# Altium PCB MOTHERBOARD.PcbDoc (part 2 of 3)
Units mm, origin at the board's own origin, x right, y up, seen from the top; angles counter-clockwise.
Board outline 187 x 77 mm, 4 copper layers (Top Layer, Layer 1, Layer 2, Bottom Layer), stack 1.57 mm thick; 242 components, 225 nets, 1094 pads, 711 vias.
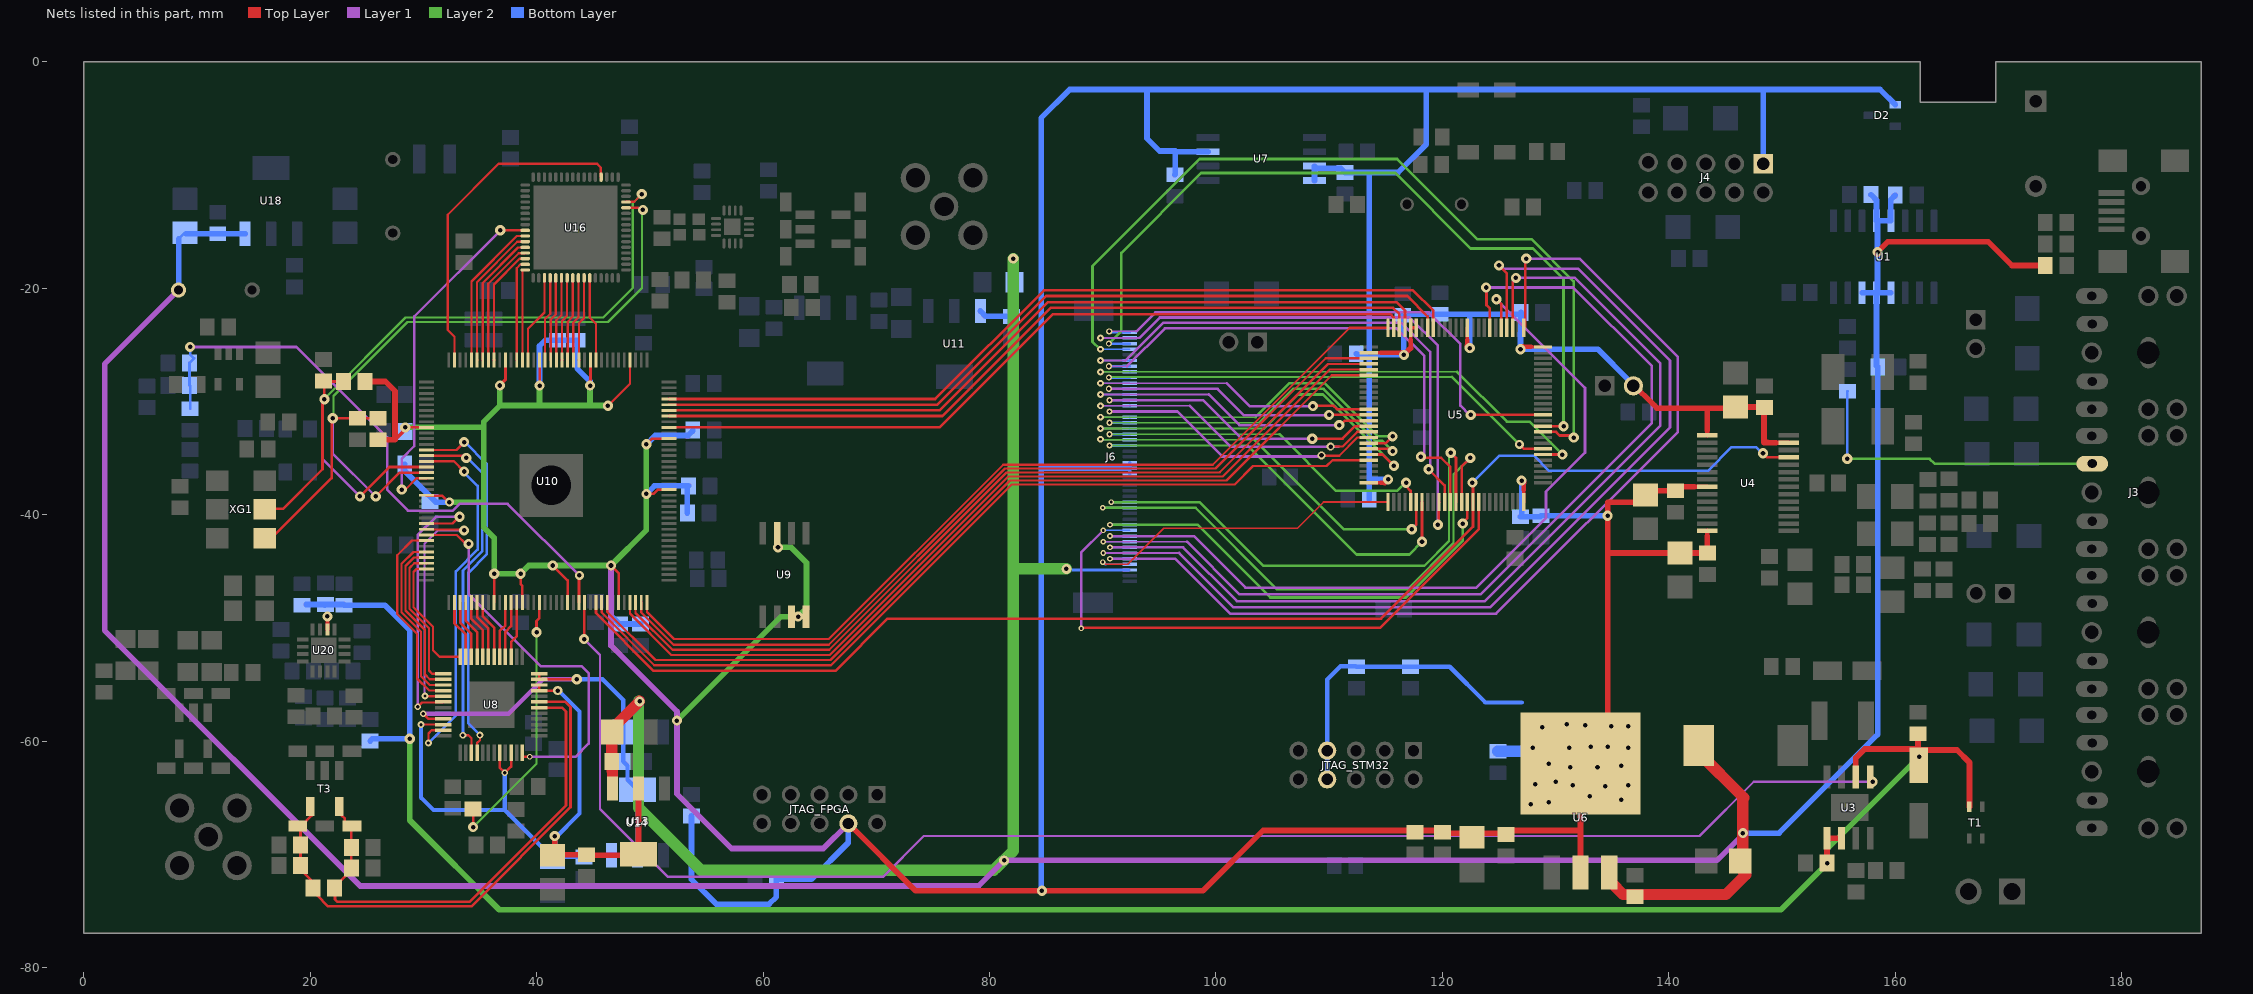
[diagram p4: the nets of this part, all layers, seen from the top]

## Via types
v1: diameter 0.9, hole 0.4, Top Layer to Bottom Layer, tented both sides, 305 vias
v2: diameter 0.6, hole 0.3, Top Layer to Bottom Layer, tented both sides, 286 vias
v3: diameter 0.5, hole 0.3, Top Layer to Bottom Layer, tented both sides, 69 vias
v4: diameter 0.5, hole 0.25, Top Layer to Bottom Layer, tented both sides, 16 vias
v5: diameter 0.55, hole 0.3, Top Layer to Bottom Layer, tented both sides, 12 vias
v6: diameter 0.6, hole 0.25, Top Layer to Bottom Layer, tented both sides, 11 vias
v7: diameter 0.8, hole 0.4, Top Layer to Bottom Layer, tented both sides, 5 vias
v8: diameter 4, hole 3, Top Layer to Bottom Layer, 4 vias
v9: diameter 0.7, hole 0.4, Top Layer to Bottom Layer, tented both sides, 2 vias
v10: diameter 0.5, hole 0.2, Top Layer to Bottom Layer, tented both sides, 1 vias

## Nets (pads, with @x,y where several pads share a name; then routed paths per layer and width w, separated by ;. In a path a pad name is that pad's centre, name@x,y a point inside that pad or via, vN(x,y) a via of type N, cw(c..) or ccw(c..) an arc to the next point about the centre after c; other vN are vias at no path point) (continued)
+3V3: BOOT.2 C19.1 C20.1 C21.2 C22.1 C23.2 C24.1 C44.2 C45.2 C46.2 C47.2 C48.2 C49.2 C50.2 C51.1 C52.1 C54.1 C56.2 C59.2 C70.1 C76.1 C79.1 C86.1 C88.1 C94.1 C99.1 D2.1 J4.1 J6.24 J6.25 J6.26 JTAG_FPGA.4 JTAG_STM32.7 JTAG_STM32.8 R20.1 R21.1 R24.1 R30.2 R31.2 R32.2 R33.2 R36.1 R37.1 R39.1 R47.2 U4.1 U4.8 U4.14 U4.27 U5.11 U5.20 U5.21 U5.27 U5.50 U5.75 U5.100 U6.2 U6.4 U7.3 U7.7 U7.8 U9.3 U9.7 U9.8 U10.17 U10.26 U10.40 U10.47 U10.56 U10.62 U10.81 U10.93 U10.117 U10.122 U10.130 U10.139 | length 695.2
  Top Layer w0.2: v1(46.3,-30.4) 48.25,-28.45 U10.40@48.25,-26.35
  Top Layer w0.23: v1@28.6,-32.3 U10.81@30.3,-32.3 ; U10.93@30.3,-38.3 30.327,-38.327 30.335,-38.335 31.659,-38.335 32.224,-38.9 v7(32.3,-38.9) ; U10.117@36.25,-47.75 36.261,-47.739 v1@36.261,-45.407 ; v1(38.588,-45.229) 38.588,-46.144 38.75,-46.306 U10.122@38.75,-47.75 ; U10.56@40.25,-26.35 40.266,-26.366 v1(40.266,-28.607) ; v1(41.425,-44.5) 42.75,-45.825 U10.130@42.75,-47.75 ; v1(46.575,-44.5) 47.25,-45.175 U10.139@47.25,-47.75 ; v1(49.7,-33.8) 50.2,-33.3 U10.26@51.7,-33.3 ; 50.192,-38.174 50.338,-38.174 50.712,-37.8 U10.17@51.7,-37.8
  Top Layer w0.254: 37.25,-28.115 U10.62@37.25,-26.35 ; v1@44.75,-28.212 U10.47@44.75,-26.35
  Top Layer w0.3: 27.5,-33.4 v1@28.5,-32.4 ; v1(36.763,-28.603) 37.25,-28.115 ; v1@44.723,-28.238 v1@44.75,-28.212 ; U5.50@113.5,-37.2 114.55,-37.2 ; U5.27@113.5,-25.7 114.55,-25.7 ; 117.2,-24.55 U5.21@117.2,-23.5 U5.20@117.7,-23.5 ; 122.2,-24.55 U5.11@122.2,-23.5 ; U5.75@127.2,-38.9 127.2,-37.85 ; 127.85,-25.2 U5.100@128.9,-25.2
  Top Layer w0.4: 114.55,-37.2 v1@114.9,-37.2 ; 114.55,-25.7 v1@116.4,-25.7 ; 117.2,-25.3 117.2,-24.55 ; v1@122.2,-25.082 122.2,-24.55 ; v1@127.1,-25.2 127.85,-25.2 ; 127.2,-37.85 v1@127.2,-37.2 ; 142.25,-37.55 U4.8@143.4,-37.55 ; 143.4,-41.9 U4.14@143.4,-41.45 ; U4.1@143.4,-33 143.4,-32.55 ; 149.45,-33.65 U4.27@150.6,-33.65
  Top Layer w0.5: R20.1@24.85,-28.25 26.65,-28.25 27.5,-29.1 27.5,-33.4 R21.1@26,-33.4 ; JTAG_FPGA.4@67.539,-67.285 73.486,-73.232 v1(84.632,-73.232) 98.836,-73.232 104.168,-67.9 C44.2@120.002,-67.9 ; v1@114.9,-37.2 v1(115.2,-36.9) ; v1@116.4,-25.7 v1(116.6,-25.9) 117.2,-25.3 ; C44.2@120.002,-67.897 C44.2@120.002,-67.9 ; v1@122.2,-25.082 v1(122.412,-25.294) ; v1(126.9,-25.4) v1@127.1,-25.2 ; v1(127,-37) v1@127.2,-37.2 ; U6.2@132.2,-71.6 132.2,-67.9 ; U6.4@132.2,-62 132.2,-67.9 ; U6.4@132.3,-58.76 132.37,-58.83 133.57,-60.03 133.87,-60.33 U6.4@134.591,-61.051 ; U6.4@132.646,-65.2 U6.4@135.64,-65.2 ; v1(134.6,-60.5) U6.4@134.591,-60.5 ; v1(135.8,-65.2) U6.4@135.64,-65.2 ; v1(135.8,-62.2) 135.74,-62.2 U6.4@135.64,-62.1 ; BOOT.2@136.54,-28.2 138.94,-30.6 143.4,-30.6 ; 142.25,-37.55 140.95,-37.55 C23.2@140.6,-37.9 138.3,-37.9 138,-38.2 137.926,-38.274 137.3,-38.9 134.591,-38.9 v1(134.591,-40.105) 134.591,-43.4 ; 143.4,-41.9 C21.2@143.4,-43.4 C22.1@141,-43.4 134.591,-43.4 ; 143.4,-32.55 143.4,-30.6 ; 149.45,-33.65 148.726,-33.65 148.713,-33.637 148.4,-33.637 148.4,-30.6 C19.1@148.45,-30.55 148.4,-30.5 C20.1@145.9,-30.5 145.8,-30.6 143.4,-30.6 ; C44.2@120.002,-67.9 120.002,-68.15 125.8,-68.15 125.8,-67.9 132.2,-67.9 ; U6.4@134.591,-61.051 U6.4@134.591,-60.5 ; U6.4@134.591,-61.051 U6.4@135.64,-62.1 ; U6.4@134.591,-60.5 134.591,-43.4 ; U6.4@135.64,-65.2 U6.4@135.64,-62.1
  Layer 1 w0.5: v1(46.575,-44.5) 46.575,-51.575 52.4,-57.4 52.4,-58.674 ; v1(52.4,-58.2) 52.4,-64.668 57.232,-69.5 65.324,-69.5 JTAG_FPGA.4@67.539,-67.285
  Layer 2 w0.5: v1(28.4,-32.3) 35.325,-32.3 ; v7(32.3,-38.9) 35.325,-38.9 ; v1(36.763,-28.603) 36.763,-30.375 ; v1(40.266,-28.607) 40.266,-30.291 40.35,-30.375 ; v1(44.723,-28.607) 44.723,-30.323 44.775,-30.375 ; v1(46.3,-30.4) 46.275,-30.375 44.775,-30.375 ; v1(46.575,-44.5) v1(41.425,-44.5) 39.317,-44.5 v1(38.588,-45.229) v1(36.261,-45.229) 36.261,-42.061 35.325,-41.125 35.325,-38.9 ; v1@46.6,-44.475 49.7,-41.375 v1(49.7,-38.174) v1(49.7,-33.8) ; v1(52.4,-58.2) 61.582,-49.017 v1(63.095,-49.017) 63.844,-48.268 63.844,-44.251 62.495,-42.902 v1(61.326,-42.902) ; 35.325,-38.9 35.325,-32.3 ; 35.325,-32.3 35.325,-31.813 36.763,-30.375 ; 36.763,-30.375 40.35,-30.375 ; 40.35,-30.375 44.775,-30.375
  Bottom Layer w0.3: J6.26@92.4,-36.4 J6.25@92.4,-35.9 J6.24@92.4,-35.4
  Bottom Layer w0.381: JTAG_STM32.8@109.83,-63.39 JTAG_STM32.7@109.83,-60.85 109.83,-54.57 111,-53.4 112.35,-53.4 R37.1@112.4,-53.45 R33.2@117.2,-53.45 120.65,-53.45 123.8,-56.6 127,-56.6
  Bottom Layer w0.5: R24.1@28.36,-35.55 28.36,-36.16 31.1,-38.9 v7(32.3,-38.9) ; v1(40.266,-28.607) 40.266,-25.109 40.776,-24.599 C76.1@43.587,-24.599 43.587,-27.102 v1@44.723,-28.238 ; v1(46.575,-44.5) 46.575,-48.935 C94.1@47.311,-49.671 C99.1@49.177,-49.671 ; v1(49.7,-38.174) 50.408,-37.466 R47.2@53.424,-37.466 53.324,-37.566 R30.2@53.324,-39.866 ; v1(49.7,-33.8) 50.482,-33.018 53.386,-33.018 53.786,-32.618 C70.1@53.786,-32.518 ; R32.2@53.689,-66.619 53.689,-72.224 55.875,-74.41 60.543,-74.41 61.181,-73.771 61.181,-72.232 R31.2@61.195,-72.219 64.29,-72.219 67.525,-68.983 67.525,-67.299 JTAG_FPGA.4@67.539,-67.285 ; v1(84.632,-73.232) 84.564,-73.164 84.564,-35.534 84.564,-4.978 87.087,-2.455 93.915,-2.455 ; 84.7,-35.9 J6.25@92.4,-35.9 ; R39.1@96.368,-9.987 96.395,-9.96 96.395,-7.895 ; U7.3@99.3,-7.96 96.46,-7.96 96.395,-7.895 ; U7.8@108.7,-10.5 U7.7@108.7,-9.438 ; U7.7@108.7,-9.23 U7.7@108.7,-9.438 ; C49.2@112.4,-25.8 112.5,-25.9 113.385,-25.9 ; C46.2@113.551,-38.647 113.551,-36.9 ; v1(115.2,-36.9) 113.551,-36.9 ; v1(122.412,-25.294) 122.412,-22.3 ; C50.2@126.95,-22.15 126.95,-22.3 C50.2@126.948,-22.3 ; v1(127,-37) 127,-40.1 C48.2@126.9,-40.2 128.634,-40.2 128.729,-40.105 v1(134.591,-40.105) ; BOOT.2@136.54,-28.2 133.74,-25.4 v1(126.9,-25.4) C50.2@126.948,-22.3 ; J4.1@148.34,-9.02 148.34,-2.455 ; D2.1@160,-3.8 158.655,-2.455 148.34,-2.455 ; 93.915,-2.455 118.576,-2.455 ; 93.915,-2.455 93.915,-6.782 95.028,-7.895 96.395,-7.895 ; U7.7@108.7,-9.438 111.038,-9.438 C59.2@111.395,-9.795 113.548,-9.795 ; 113.548,-25.9 113.548,-9.795 ; 113.548,-25.9 113.551,-36.8 113.548,-36.8 113.548,-36.9 113.551,-36.9 ; 113.548,-25.9 v1(116.6,-25.9) 116.6,-22.5 C52.1@116.5,-22.4 116.5,-22.3 C51.1@119.8,-22.3 122.412,-22.3 ; 113.548,-9.795 116.087,-9.795 118.576,-7.305 118.576,-2.455 ; 118.576,-2.455 148.34,-2.455 ; 122.412,-22.3 C50.2@126.948,-22.3
  Bottom Layer w1: R36.1@124.9,-60.9 128.5,-60.9
  other v1: 127.8,-65.6 129.4,-65.4 133,-64.9 134.4,-64 131.5,-63.9 136.4,-63.9 128.2,-63.8 130,-63.6 131.3,-62.3 133.7,-62.3 129.4,-62 128,-60.6 131.2,-60.6 136.4,-60.6 133.1,-60.5 128.8,-58.8 134.9,-58.7 136.4,-58.7 132.6,-58.6 131,-58.5
+5: C14.1 C15.1 C16.1 C53.2 C60.1 C64.1 C65.1 C80.1 C81.2 C123.2 C125.1 J6.43 L3.1 L37.1 R41.1 U1.4 U1.5 U1.6 U1.12 U1.13 U6.3 U11.3 U13.3 U18.3 | length 437.3
  Top Layer w0.5: U6.3@134.74,-71.6 135,-71.86 U6.3@135,-72.6 ; v1(158.431,-16.817) 159.348,-15.9 168.2,-15.9 170.3,-18 R41.1@173.25,-18
  Top Layer w0.95: U13.3@46.7,-64.2 46.7,-62.625
  Top Layer w1: 46.7,-62.625 46.7,-61.8 46.65,-61.75 46.65,-59.25 C80.1@46.7,-59.2 46.8,-59.1 46.8,-58.8 v1(49.1,-56.5) ; U6.3@135,-72.6 135.95,-73.55 145.05,-73.55 146.8,-71.8 146.6,-71.6 C60.1@146.6,-70.6 ; L37.1@142.6,-60.996 146.602,-64.998 146.537,-65.063 v1(146.537,-68.134) C60.1@146.537,-70.6
  Layer 1 w0.5: L3.1@8.387,-20.176 1.855,-26.707 1.855,-50.23 24.432,-72.807 79.029,-72.807 v1(81.29,-70.546) 144.254,-70.546 v1@146.602,-68.198
  Layer 2 w0.381: 82.1,-44.85 82.15,-44.8
  Layer 2 w1: v1@49,-56.5 49,-65.9 51.1,-68 54.508,-71.408 80.392,-71.408 80.517,-71.283 82.1,-69.7 82.1,-44.85 v1(82.1,-17.4) ; 82.15,-44.8 v1(86.8,-44.8)
  Bottom Layer w0.2: C125.1@8.387,-15.659 C125.1@8.946,-15.1 C125.1@9.046,-15.2 ; C64.1@82.1,-19.497 C64.1@82.151,-19.549
  Bottom Layer w0.3: v1(86.8,-44.8) 86.9,-44.9 J6.43@92.3,-44.9
  Bottom Layer w0.5: L3.1@8.387,-20.176 C125.1@8.387,-15.659 ; C125.1@9.046,-15.2 C123.2@11.846,-15.2 U18.3@14.261,-15.2 ; U11.3@79.2,-22.028 79.673,-22.501 81.951,-22.501 C64.1@81.951,-18.949 ; C64.1@82.1,-19.497 v1(82.1,-17.4) ; v1(146.537,-68.134) 149.737,-68.134 158.439,-59.432 C14.1@158.439,-26.955 158.34,-26.856 U1.5@158.34,-20.41 ; U1.6@157.07,-20.41 U1.5@158.34,-20.41 ; C15.1@157.85,-11.75 158.34,-12.24 U1.12@158.34,-14.06 ; U1.4@159.61,-20.41 U1.5@158.34,-20.41 ; C16.1@160,-11.8 159.61,-12.19 U1.13@159.61,-14.06 U1.12@158.34,-14.06 ; U1.5@158.34,-20.41 158.431,-20.319 v1(158.431,-16.817) 158.431,-14.151 U1.12@158.34,-14.06
+12: C1.1 C4.2 C5.2 C89.2 C90.2 C92.2 R25.2 T1.3 U3.1 U3.2 U3.6 U20.14 | length 199.3
  Top Layer w0.23: C1.1@162.067,-62.152 162.1,-62.119 v1(162.1,-61.4)
  Top Layer w0.35: U20.14@21.525,-50.15 v1@21.525,-49.075
  Top Layer w0.381: v1@21.525,-49.075 v1@21.6,-49 ; C1.1@162,-61.3 v1(162.1,-61.4) ; 166.525,-61.875 166.55,-61.9
  Top Layer w0.5: U3.2@155.241,-68.574 U3.1@153.971,-68.574 C5.2@153.971,-70.794 ; U3.6@156.511,-63.174 156.511,-61.489 157.3,-60.7 161.707,-60.7 161.707,-61.4 161.707,-61.793 C1.1@162.067,-62.152 ; C1.1@162,-61.3 C4.2@162,-59.35 ; v1(162.1,-61.4) 162.1,-60.8 165.45,-60.8 166.525,-61.875 ; T1.3@166.55,-65.8 166.55,-61.9 ; C5.2@153.971,-70.794 v1(154,-70.8) 153.973,-70.8 C5.2@153.969,-70.796 C5.2@153.971,-70.794
  Layer 2 w0.5: v1(28.8,-59.8) 28.8,-67 32.374,-70.574 33.426,-71.626 36.7,-74.9 149.9,-74.9 v1(154,-70.8) 154,-69.5 v1(162.1,-61.4)
  Bottom Layer w0.5: C92.2@19.65,-47.95 C90.2@21.35,-47.95 ; C90.2@21.3,-48 C90.2@21.35,-47.95 ; R25.2@25.3,-60 25.5,-59.8 v1(28.8,-59.8) 28.8,-50.2 26.6,-48 C89.2@23,-48 22.95,-47.95 C90.2@21.35,-47.95
  other v1: 21.525,-49
+VA: C71.2 C77.1 C83.2 C85.1 U8.22 U8.32 U8.34 U8.45 U8.46 U13.2 U13.4 U14.3 | length 68.8
  Top Layer w0.2: v2@29.8,-58.525 29.825,-58.55 U8.22@31.762,-58.55
  Top Layer w0.23: U8.32@36.75,-61.038 36.75,-62.35 v2(37.2,-62.8) 37.75,-62.25 U8.34@37.75,-61.038 ; U8.46@40.238,-55.05 U8.45@40.238,-55.55 40.243,-55.545 41.87,-55.545 v7(41.875,-55.55)
  Top Layer w0.5: C85.1@41.4,-70.1 41.3,-70 41.6,-69.7 v1(41.6,-68.4) ; C85.1@41.6,-70.05 44.25,-70.05 44.3,-70.1 48.9,-70.1 U13.4@49,-70 U13.2@49,-64.2
  Bottom Layer w0.381: v2@29.8,-58.525 29.8,-65 30.9,-66.1 37.2,-66.1 ; v2(37.2,-62.8) 37.2,-66.1 ; C77.1@41.4,-70.3 41.3,-70.3 40.491,-69.49 40.491,-69.39 37.2,-66.1 ; C77.1@41.45,-70.25 C71.2@44.2,-70.25 44.35,-70.1 U14.3@46.615,-70.1 ; v1@41.6,-68.6 43.8,-66.4 43.8,-57.4 41.95,-55.55 v7(41.875,-55.55)
  Bottom Layer w0.5: C77.1@41.4,-70.3 41.45,-70.25 41.6,-70.1 41.6,-68.6 v1(41.6,-68.4)
  other v2: 29.8,-58.55
+VD: C75.1 C78.2 U8.21 U8.47 U8.48 U14.2 U14.4 | length 39.7
  Top Layer w0.23: v2(30,-57.6) 30.45,-58.05 U8.21@31.762,-58.05 ; U8.48@40.238,-54.05 U8.47@40.238,-54.55 v1(43.55,-54.55)
  Layer 1 w0.381: v2(30,-57.6) 37.525,-57.6 40.575,-54.55 v1(43.55,-54.55)
  Bottom Layer w0.381: v1(43.55,-54.55) 45.825,-54.55 47.65,-56.375 C78.2@47.65,-61.8 48.031,-62.181 48.031,-63.415 U14.4@48.915,-64.3 U14.2@48.915,-70.1
AD1_CS: J6.35 U5.65 | length 41.2
  Top Layer w0.23: v1(121.8,-40.8) 121.8,-40.7 122.2,-40.3 U5.65@122.2,-38.9
  Layer 2 w0.23: v4(90.65,-40.9) 98.373,-40.9 104.8,-47.327 116.773,-47.327 121.8,-42.3 v1(121.8,-40.8)
  Bottom Layer w0.23: v4(90.65,-40.9) J6.35@92.4,-40.9
AD2_CS: J6.36 U5.67 | length 52.9
  Top Layer w0.23: v4@88.14,-50 114.5,-50 123.2,-41.3 U5.67@123.2,-38.9
  Layer 1 w0.23: v4(88.1,-50.05) 88.1,-43.35 v4(90.05,-41.4)
  Bottom Layer w0.15: v4(90.05,-41.4) J6.36@92.4,-41.4
AD3_CS: J6.42 U5.51 | length 30
  Top Layer w0.15: v4(90,-44.2) 90.073,-44.2 90.265,-44.392 92.208,-44.392 95.4,-41.2 107.2,-41.2 109.5,-38.9 U5.51@115.2,-38.9
  Bottom Layer w0.15: 90.254,-44.4 J6.42@92.4,-44.4
  Bottom Layer w0.23: v4(90,-44.2) 90.054,-44.2 90.254,-44.4
AF_AMP_IN: C12.2 J3.5 | length 27.8
  Layer 2 w0.23: v1(155.75,-35.075) 163.033,-35.075 163.468,-35.51 J3.5@177.394,-35.51
  Bottom Layer w0.23: v1(155.75,-35.075) 155.75,-29.15 C12.2@155.8,-29.1
AUDIO_48K_CLOCK: U5.46 U10.136 | length 77.5
  Top Layer w0.2: U10.136@45.75,-47.75 45.75,-48.65 50.4,-53.3 66,-53.3 81.958,-37.342 101.658,-37.342 103.277,-35.723 109.777,-35.723 110.3,-35.2 U5.46@112.96,-35.2
AUDIO_I2S_CLOCK: U4.25 U5.66 U10.135 | length 120.4
  Top Layer w0.23: U10.135@45.25,-47.75 45.25,-48.7 50.35,-53.8 66.4,-53.8 71,-49.2 114.577,-49.2 122.7,-41.077 U5.66@122.7,-38.9 122.7,-37.224 v1(122.656,-37.18) ; v1(148.316,-34.595) 148.671,-34.95 U4.25@150.6,-34.95
  Bottom Layer w0.23: v1(122.656,-37.18) 125.036,-34.8 128.091,-34.8 129.426,-36.135 143.44,-36.135 145.525,-34.05 147.713,-34.05 148.287,-34.624 v1(148.316,-34.595)
CHARGE_PUMP: C134.2 R45.1 R51.1 U10.132 | length 54.1
  Top Layer w0.23: U10.132@43.75,-47.75 43.75,-45.4 v7(43.775,-45.375)
  Layer 1 w0.23: v1(9.4,-25.2) 18.8,-25.2 26.8,-33.2 26.8,-37.8 28.65,-39.65 32.611,-39.65 33.211,-39.05 37.45,-39.05 v7(43.775,-45.375)
  Bottom Layer w0.23: R45.1@9.4,-30.65 9.4,-28.65 R51.1@9.35,-28.6 9.35,-26.6 9.75,-26.2 9.4,-25.85 v1(9.4,-25.2)
CLK_122.88M: R21.2 R22.1 U10.89 U16.12 XG1.4 | length 73.4
  Top Layer w0.2: U16.12@47.9,-12.9 48.979,-12.9 49.179,-13.1 v1(49.4,-13.1)
  Top Layer w0.23: XG1.4@16,-42.08 16.593,-42.08 21.9,-36.773 21.9,-31.5 v1(22,-31.5) R22.1@24.2,-31.5 R21.2@26,-31.5 ; v1(25.8,-38.4) 27.9,-36.3 U10.89@30.3,-36.3
  Layer 1 w0.23: v1(22,-31.5) 22,-34.6 v1(25.8,-38.4)
  Layer 2 w0.2: v1(22,-31.5) 22.077,-31.424 22.077,-29.523 28.6,-23 46.3,-23 49.315,-19.985 49.315,-13.185 v1(49.4,-13.1) ; v1(25.8,-38.4) v1@25.8,-38
CLK_N_122.88M: R20.2 R23.1 U10.88 U16.13 XG1.5 | length 75
  Top Layer w0.2: U16.13@47.9,-12.4 47.919,-12.381 48.619,-12.381 v1(49.3,-11.7)
  Top Layer w0.23: XG1.5@16,-39.54 16,-39.5 17.6,-39.5 21.1,-36 21.1,-29.99 v1(21.269,-29.822) 21.269,-28.269 R23.1@21.25,-28.25 ; R20.2@22.95,-28.25 R23.1@21.25,-28.25 ; v1(24.4,-38.4) 27,-35.8 U10.88@30.3,-35.8 ; R23.1@21.25,-28.25 R23.1@21.2,-28.2 R23.1@21.25,-28.25
  Layer 1 w0.23: v1(21.269,-29.822) 21.1,-29.822 21.1,-35.1 v1(24.4,-38.4)
  Layer 2 w0.2: v1(21.269,-29.822) 21.269,-29.766 28.434,-22.6 45.9,-22.6 48.5,-20 48.5,-12.5 v1(49.3,-11.7)
CLKOUTA: U10.90 U16.41 | length 31.3
  Top Layer w0.2: v1(28.1,-37.8) 28.4,-37.8 29.4,-36.8 U10.90@30.3,-36.8 ; v1(36.8,-14.9) U16.41@39,-14.9
  Layer 1 w0.23: v1(28.1,-37.8) 28.1,-35.056 29.2,-33.956 29.2,-22.5 v1(36.8,-14.9)
DA0: U10.68 U16.42 | length 13.4
  Top Layer w0.2: U10.68@34.25,-26.35 34.25,-19.41 38.26,-15.4 U16.42@39,-15.4
  Top Layer w0.23: U10.68@34.25,-26.35 U10.68@34.262,-26.338
DA1: U10.67 U16.43 | length 12.6
  Top Layer w0.2: U10.67@34.75,-26.35 34.75,-19.476 38.307,-15.919 38.981,-15.919 U16.43@39,-15.9
  Top Layer w0.23: U10.67@34.75,-26.35 U10.67@34.757,-26.343
DA2: U10.66 U16.44 | length 11.9
  Top Layer w0.2: U10.66@35.25,-26.35 35.25,-19.542 38.372,-16.419 38.981,-16.419 U16.44@39,-16.4
DA3: U10.65 U16.45 | length 11.1
  Top Layer w0.2: U10.65@35.746,-26.346 35.746,-19.611 38.438,-16.919 38.981,-16.919 U16.45@39,-16.9
  Top Layer w0.23: U10.65@35.746,-26.346 U10.65@35.75,-26.35
DA4: U10.64 U16.46 | length 10.4
  Top Layer w0.2: U10.64@36.241,-26.341 36.241,-19.682 38.504,-17.419 38.981,-17.419 U16.46@39,-17.4
  Top Layer w0.23: U10.64@36.241,-26.341 U10.64@36.25,-26.35
DA5: U10.60 U16.47 | length 9
  Top Layer w0.2: U10.60@38.25,-26.35 38.25,-18.239 38.569,-17.919 38.981,-17.919 U16.47@39,-17.9
DA6: U10.59 U16.48 | length 8.2
  Top Layer w0.2: U10.59@38.75,-26.35 38.75,-18.446 38.796,-18.4 U16.48@39,-18.4
  Top Layer w0.23: U10.59@38.75,-26.35 U10.59@38.767,-26.333
DA7: U10.58 U16.51 | length 7.9
  Top Layer w0.2: U10.58@39.25,-26.35 39.25,-23.601 40.7,-22.151 U16.51@40.7,-19.1
DA8: U10.55 U16.52 | length 7.4
  Top Layer w0.2: U10.55@40.75,-26.35 40.75,-22.707 41.2,-22.257 U16.52@41.2,-19.1
DA9: U10.54 U16.53 | length 7.4
  Top Layer w0.2: U10.54@41.25,-26.35 41.25,-22.773 41.7,-22.323 U16.53@41.7,-19.1
  Top Layer w0.23: U10.54@41.25,-26.35 U10.54@41.253,-26.347
DA10: U10.53 U16.54 | length 7.4
  Top Layer w0.2: U10.53@41.75,-26.35 41.75,-22.838 42.2,-22.388 U16.54@42.2,-19.1
  Top Layer w0.23: U10.53@41.747,-26.347 U10.53@41.75,-26.35
DA11: U10.52 U16.55 | length 7.5
  Top Layer w0.2: U10.52@42.25,-26.35 42.25,-22.904 42.7,-22.454 U16.55@42.7,-19.1
  Top Layer w0.23: U10.52@42.25,-26.35 U10.52@42.275,-26.325
DA12: U10.51 U16.56 | length 7.5
  Top Layer w0.2: U10.51@42.75,-26.35 42.75,-22.97 43.2,-22.52 U16.56@43.2,-19.1
  Top Layer w0.23: U10.51@42.75,-26.35 U10.51@42.763,-26.337
DA13: U10.50 U16.57 | length 7.4
  Top Layer w0.2: U10.50@43.25,-26.35 43.25,-23.035 43.7,-22.585 U16.57@43.7,-19.1
  Top Layer w0.23: U10.50@43.25,-26.35 U10.50@43.258,-26.342
DA14: U10.49 U16.58 | length 7.5
  Top Layer w0.2: U10.49@43.75,-26.35 43.75,-23.101 44.2,-22.651 U16.58@44.2,-19.1
  Top Layer w0.23: U10.49@43.75,-26.35 U10.49@43.761,-26.339
DA15: U10.46 U16.59 | length 7.5
  Top Layer w0.2: U16.59@44.7,-19.1 44.7,-22.601 45.25,-23.151 U10.46@45.25,-26.35
DAC1: U8.16 U10.101 | length 17.6
  Top Layer w0.2: U10.101@30.3,-42.3 29,-42.3 27.7,-43.6 27.7,-48.775 29.45,-50.525 29.45,-54.475 30.525,-55.55 U8.16@31.762,-55.55 U8.16@31.721,-55.51
DAC2: U8.15 U10.103 | length 15.6
  Top Layer w0.2: U10.103@30.3,-43.3 29.125,-43.3 28.075,-44.35 28.075,-48.625 29.8,-50.35 29.8,-54.275 30.575,-55.05 U8.15@31.762,-55.05
DAC3: U8.14 U10.104 | length 14.3
  Top Layer w0.2: U10.104@30.3,-43.8 29.175,-43.8 28.425,-44.55 28.425,-48.48 30.15,-50.205 30.15,-54.125 30.575,-54.55 U8.14@31.762,-54.55
DAC4: U8.13 U10.105 | length 12.8
  Top Layer w0.2: U10.105@30.3,-44.3 29.2,-44.3 28.775,-44.725 28.775,-48.325 30.5,-50.05 30.5,-53.776 30.774,-54.05 U8.13@31.762,-54.05
DAC5: U8.12 U10.106 | length 11.5
  Top Layer w0.2: U10.106@30.3,-44.8 29.4,-44.8 29.125,-45.075 29.125,-48.18 30.85,-49.905 30.85,-51.975 31.437,-52.562 U8.12@33.25,-52.562
DAC6: U8.11 U10.110 | length 5.2
  Top Layer w0.23: U10.110@32.75,-47.75 32.75,-49.606 33.75,-50.606 U8.11@33.75,-52.562
DAC7: U8.10 U10.111 | length 5.2
  Top Layer w0.23: U10.111@33.25,-47.75 33.25,-49.548 34.25,-50.548 U8.10@34.25,-52.562
DAC8: U8.9 U10.112 | length 5.2
  Top Layer w0.23: U10.112@33.75,-47.75 33.75,-49.384 34.75,-50.384 U8.9@34.75,-52.562
DAC9: U8.8 U10.113 | length 5.2
  Top Layer w0.23: U10.113@34.25,-47.75 34.25,-49.219 35.25,-50.219 U8.8@35.25,-52.562
DAC10: U8.7 U10.114 | length 5.2
  Top Layer w0.23: U10.114@34.75,-47.75 34.75,-49.055 35.75,-50.055 U8.7@35.75,-52.562
DAC11: U8.6 U10.115 | length 5.2
  Top Layer w0.23: U10.115@35.25,-47.75 35.25,-48.997 36.25,-49.997 U8.6@36.25,-52.562
DAC12: U8.5 U10.119 | length 5
  Top Layer w0.23: U8.5@36.75,-52.562 36.75,-50.298 37.25,-49.798 U10.119@37.25,-47.75
DAC13: U8.4 U10.120 | length 5
  Top Layer w0.23: U8.4@37.25,-52.562 37.25,-50.356 37.75,-49.856 U10.120@37.75,-47.75
DAC14: U8.3 U10.121 | length 5
  Top Layer w0.23: U8.3@37.75,-52.562 37.75,-51.25 38.25,-50.75 U10.121@38.25,-47.75
DAC_CLK: C63.1 U10.125 | length 23.9
  Top Layer w0.2: v1(34.4,-67.6) C63.1@34.4,-66
  Top Layer w0.23: v1(40,-50.4) 40,-49.4 40.25,-49.15 U10.125@40.25,-47.75
  Layer 2 w0.2: v1(34.4,-67.6) 40,-62 v1(40,-50.4)
DAC_DIV0: U8.28 U10.85 | length 33.1
  Top Layer w0.2: U10.85@30.3,-34.3 32.939,-34.3 33.6,-33.639 v1(33.6,-33.6) ; U8.28@34.75,-61.038 34.75,-60.175 35,-59.925 v2(35,-59.475)
  Bottom Layer w0.23: v1@33.6,-33.615 33.682,-33.615 35.6,-35.533 35.6,-43.516 33.971,-45.145 33.971,-58.446 v2(35,-59.475)
DAC_DIV1: U8.27 U10.86 | length 31.5
  Top Layer w0.2: U10.86@30.3,-34.8 33.6,-34.8 v1(33.8,-35) ; v2(33.5,-59.5) 34,-59.5 34.25,-59.75 U8.27@34.25,-61.038
  Bottom Layer w0.23: v2@33.501,-59.501 33.501,-44.951 35.2,-43.251 35.2,-36.3 v1@33.85,-34.95
DAC_HP1: U8.17 U10.99 | length 22.6
  Top Layer w0.2: v2@30.15,-56.05 U8.17@31.762,-56.05 ; v2(30.15,-56.025) v2@30.344,-56.025 ; U10.99@30.3,-41.3 30.327,-41.327 33.527,-41.327 v1(33.6,-41.4)
  Layer 1 w0.2: v2(30.15,-56.025) 30.1,-55.975 30.1,-42.575 31.275,-41.4 v1(33.6,-41.4)
DAC_HP2: U8.18 U10.98 | length 25.2
  Top Layer w0.2: v2@29.5,-56.873 v2(29.5,-56.975) 29.875,-56.6 31.712,-56.6 U8.18@31.762,-56.55 ; U10.98@30.3,-40.8 32.579,-40.8 32.979,-40.4 33,-40.4 v1(33.2,-40.2)
  Layer 1 w0.23: v2(29.5,-56.975) 29.5,-41.8 31.1,-40.2 v1(33.2,-40.2)
DAC_OUT_N: C17.2 R4.1 R34.2 T3.6 T3.10 U8.42 | length 44.7
  Top Layer w0.23: T3.10@22.57,-66.37 T3.10@22.57,-65.79 22.76,-65.98 22.76,-66.56 23.066,-66.866 23.066,-67.191 23.65,-67.775 R34.2@23.65,-69.4 C17.2@23.65,-71.2 23.19,-71.66 23.19,-71.86 22.15,-72.9 R4.1@22.15,-73 22.2,-73.05 22.2,-74 22.4,-74.2 34.1,-74.2 42.6,-65.7 42.6,-57.4 42.25,-57.05 U8.42@40.238,-57.05
DAC_OUT_P: C18.2 R4.2 R35.2 T3.4 T3.11 U8.43 | length 47.9
  Top Layer w0.23: C18.2@19.15,-71 19.15,-71.35 20.391,-72.59 20.391,-72.859 R4.2@20.25,-73 20.6,-73 20.6,-73.6 21.6,-74.6 34.25,-74.6 43,-65.85 43,-57 42.55,-56.55 U8.43@40.238,-56.55 ; C18.2@19.15,-71 R35.2@19.15,-69.2 19.15,-67.75 T3.4@18.9,-67.5 19.225,-67.5 20.135,-66.59 20.135,-65.79 T3.11@20.03,-65.79
DAC_PD: U8.36 U10.100 | length 34.8
  Top Layer w0.2: U10.100@30.3,-41.8 32.96,-41.8 33.761,-42.6 v1(34,-42.6) ; U8.36@38.75,-61.038 38.75,-61.35 38.8,-61.4 v3(39.4,-61.4)
  Layer 1 w0.23: v1(34,-42.6) 34,-47 40.4,-53.4 44,-53.4 44.6,-54 44.6,-60.225 43.425,-61.4 v3(39.4,-61.4)
DAC_X4: U8.23 U10.87 | length 32.2
  Top Layer w0.2: U10.87@30.3,-35.3 32.7,-35.3 v1(33.6,-36.2) ; v2(30.45,-60.175) 30.45,-59.333 30.724,-59.059 31.753,-59.059 U8.23@31.762,-59.05
  Bottom Layer w0.23: v2(30.45,-60.175) 32.875,-57.75 32.875,-45.019 34.8,-43.094 34.8,-37.472 33.7,-36.372 v1@33.7,-36.2
DCDC_SYNC: U3.5 U10.133 | length 137.4
  Top Layer w0.2: v1(44.2,-51) 44.225,-50.975 44.225,-47.775 U10.133@44.25,-47.75
  Layer 1 w0.2: v1@44.2,-50.8 v1(44.2,-51) 45.6,-52.4 45.6,-66 51.6,-72 70.6,-72 74.2,-68.4 142.7,-68.4 147.5,-63.6 v1(158,-63.6)
DITH: U10.71 U16.20 | length 29.5
  Top Layer w0.2: U10.71@32.75,-26.35 32.75,-24.3 32.15,-23.7 32.15,-13.52 36.645,-9.025 45.35,-9.025 45.681,-9.356 45.681,-10.181 U16.20@45.7,-10.2
ENC2_CLK: J6.38 U5.7 | length 85.2
  Top Layer w0.23: v1(123.864,-19.949) 123.9,-19.986 123.9,-21.5 124.2,-21.8 U5.7@124.2,-23.5
  Layer 1 w0.15: v4(90.05,-42.4) 97.45,-42.4
  Layer 1 w0.23: 97.45,-42.4 102.1,-47.05 123.35,-47.05 138.5,-31.9 138.5,-26.9 131.549,-19.949 v1(123.864,-19.949)
  Bottom Layer w0.15: v4(90.05,-42.4) J6.38@92.4,-42.4
ENC2_DT: J6.37 U5.5 | length 71.4
  Top Layer w0.23: v1(124.776,-20.989) 125.2,-21.413 U5.5@125.2,-23.5
  Layer 1 w0.23: v4(90.65,-41.9) 98.05,-41.9 102.6,-46.45 123.007,-46.45 129.156,-40.302 129.156,-37.981 132.6,-34.537 132.6,-28.813 v1(124.776,-20.989)
  Bottom Layer w0.23: v4(90.65,-41.9) J6.37@92.4,-41.9
ENC2_SW: J6.39 U5.3 | length 84.6
  Top Layer w0.23: U5.3@126.2,-23.5 126.2,-19.4 v1(126.5,-19.1)
  Layer 1 w0.23: v4(90.65,-42.9) 97.1,-42.9 101.85,-47.65 123.75,-47.65 139.25,-32.15 139.25,-26.65 131.7,-19.1 v1(126.5,-19.1)
  Bottom Layer w0.23: v4(90.65,-42.9) J6.39@92.4,-42.9
ENC_CLK: J6.41 U5.1 | length 90.3
  Top Layer w0.23: U5.1@127.2,-23.5 127.323,-23.377 127.323,-17.477 v1(127.4,-17.4)
  Layer 1 w0.23: v4(90.65,-43.9) 96.4,-43.9 101.25,-48.75 124.75,-48.75 140.8,-32.7 140.8,-26.1 132.1,-17.4 v1(127.4,-17.4)
  Bottom Layer w0.23: v4(90.65,-43.9) J6.41@92.4,-43.9
ENC_DT: J6.40 U5.4 | length 91.2
  Top Layer w0.23: v1(125,-18) 125.677,-18.677 125.677,-23.477 U5.4@125.7,-23.5
  Layer 1 w0.15: v4(90.05,-43.4) 96.75,-43.4
  Layer 1 w0.23: 96.75,-43.4 101.55,-48.2 124.2,-48.2 140.1,-32.3 140.1,-26.4 131.977,-18.277 125.277,-18.277 v1(125,-18)
  Bottom Layer w0.15: v4(90.05,-43.4) J6.40@92.4,-43.4
ESP_1_RX: J6.32 U5.64 | length 50.4
  Top Layer w0.23: U5.64@121.7,-38.9 121.7,-35.762 v1(122.463,-34.999)
  Layer 2 w0.2: v4(90,-39.4) 98.2,-39.4 ; 105.4,-46.6 116.9,-46.6 120.992,-42.508 120.992,-36.47 v1(122.463,-34.999)
  Layer 2 w0.23: 98.2,-39.4 105.4,-46.6
  Bottom Layer w0.2: v4(90,-39.4) J6.32@92.4,-39.4
ESP_1_TX: J6.31 U5.63 | length 47.1
  Top Layer w0.23: v1(120.74,-34.537) 121.2,-34.997 U5.63@121.2,-38.9
  Layer 2 w0.2: 104.165,-44.515 118.419,-44.515 120.592,-42.343 120.592,-34.686 v1(120.74,-34.537)
  Layer 2 w0.23: v4(90.75,-38.9) 98.55,-38.9 104.165,-44.515
  Bottom Layer w0.23: v4(90.75,-38.9) J6.31@92.4,-38.9
FMC_A18: J6.2 U5.60 | length 52
  Top Layer w0.23: v1(119.6,-40.9) 119.738,-40.9 119.665,-40.827 119.665,-38.935 U5.60@119.7,-38.9
  Layer 1 w0.15: v6@89.9,-24.4 93.25,-24.4
  Layer 1 w0.23: 93.25,-24.4 95.05,-22.6 117.108,-22.6 119.6,-25.092 v1(119.6,-40.9)
  Bottom Layer w0.15: v6@89.9,-24.4 J6.2@92.4,-24.4
  other v6: 89.8,-24.4
FMC_D0: J6.6 U5.61 | length 47.8
  Top Layer w0.23: v1(118.777,-36) 120.2,-37.423 U5.61@120.2,-38.9
  Layer 1 w0.15: v6@89.95,-26.4 92,-26.4
  Layer 1 w0.23: 92,-26.4 95.35,-23.05 116.35,-23.05 118.923,-25.623 118.923,-35.854 v1(118.777,-36)
  Bottom Layer w0.15: v6@89.95,-26.4 J6.6@92.4,-26.4
  other v6: 89.8,-26.4
FMC_D1: J6.7 U5.62 | length 47.2
  Top Layer w0.23: v1(118.1,-34.9) 118.2,-35 119.9,-35 120.7,-35.8 U5.62@120.7,-38.9
  Layer 1 w0.15: v5(90.55,-26.9) 92.15,-26.9
  Layer 1 w0.23: 92.15,-26.9 95.5,-23.55 115.95,-23.55 118.4,-26 118.4,-34.6 v1(118.1,-34.9)
  Bottom Layer w0.23: v5(90.55,-26.9) J6.7@92.4,-26.9
FMC_D2: J6.8 U5.81 | length 47.8
  Top Layer w0.23: U5.81@128.9,-34.7 128.911,-34.711 128.922,-34.7 v1(130.6,-34.7)
  Layer 2 w0.15: v6@89.95,-27.4 121.3,-27.4
  Layer 2 w0.23: 121.3,-27.4 125.7,-31.8 127.7,-31.8 v1(130.6,-34.7)
  Bottom Layer w0.15: v6@89.95,-27.4 J6.8@92.4,-27.4
  other v6: 89.8,-27.4
FMC_D3: J6.9 U5.82 | length 42.9
  Top Layer w0.23: v7(126.8,-33.8) 127.2,-34.2 U5.82@128.9,-34.2
  Layer 2 w0.15: v5@90.6,-27.85 120.85,-27.85
  Layer 2 w0.23: v5(90.55,-27.9) v5@90.6,-27.85 ; 120.85,-27.85 v7(126.8,-33.8)
  Bottom Layer w0.23: v5(90.55,-27.9) J6.9@92.4,-27.9
FMC_D4: J6.10 U5.37 | length 27
  Top Layer w0.23: v1(108.565,-30.423) 108.611,-30.377 110.341,-30.377 110.364,-30.4 110.392,-30.4 110.692,-30.7 U5.37@113.5,-30.7
  Layer 1 w0.15: v6@89.95,-28.4 100.954,-28.4
  Layer 1 w0.23: 100.954,-28.4 102.977,-30.423 v1(108.565,-30.423)
  Bottom Layer w0.15: v6@89.95,-28.4 J6.10@92.4,-28.4
  other v6: 89.8,-28.4
FMC_D5: J6.11 U5.38 | length 25.8
  Top Layer w0.23: v1(110,-31.2) U5.38@113.5,-31.2
  Layer 1 w0.23: v5(90.55,-28.9) 100.149,-28.9 102.494,-31.246 109.954,-31.246 v1(110,-31.2)
  Bottom Layer w0.23: v5(90.55,-28.9) J6.11@92.4,-28.9
FMC_D6: J6.12 U5.39 | length 27.2
  Top Layer w0.23: v1(110.9,-32.1) 111,-32.1 111.4,-31.7 U5.39@113.5,-31.7
  Layer 1 w0.15: v6@90,-29.4 99.379,-29.4
  Layer 1 w0.23: 99.379,-29.4 102.079,-32.1 v1(110.9,-32.1)
  Bottom Layer w0.15: v6@90,-29.4 J6.12@92.4,-29.4
  other v6: 89.8,-29.4
FMC_D7: J6.13 U5.40 | length 26.6
  Top Layer w0.23: v1(108.5,-33.3) 111.2,-33.3 112.3,-32.2 U5.40@113.5,-32.2
  Layer 1 w0.23: v5(90.6,-29.9) 98.864,-29.9 102.264,-33.3 v1(108.5,-33.3)
  Bottom Layer w0.23: v5(90.6,-29.9) J6.13@92.4,-29.9
FMC_D8: J6.14 U5.41 | length 29.4
  Top Layer w0.2: v9(110.125,-34) 111.192,-34 112.492,-32.7
  Top Layer w0.23: 112.492,-32.7 U5.41@113.5,-32.7
  Layer 1 w0.15: v6@90,-30.4 97.695,-30.4
  Layer 1 w0.23: 97.695,-30.4 101.318,-34.023 110.806,-34.023 110.829,-34 v9(110.125,-34)
  Bottom Layer w0.15: v6@90,-30.4 J6.14@92.4,-30.4
  other v6: 89.8,-30.4
FMC_D9: J6.15 U5.42 | length 27
  Top Layer w0.2: v9@109.325,-34.875 109.4,-34.8 110.887,-34.8 112.487,-33.2 U5.42@113.5,-33.2
  Layer 1 w0.23: v5(90.6,-30.9) 96.599,-30.9 100.574,-34.875 v9@109.325,-34.875
  Bottom Layer w0.23: v5(90.6,-30.9) J6.15@92.4,-30.9
  other v9: 109.325,-34.775
FMC_D10: J6.16 U5.43 | length 33.5
  Top Layer w0.23: U5.43@113.5,-33.7 115,-33.7 v1(115.6,-33.1)
  Layer 2 w0.15: v6@90,-31.4 103.5,-31.4
  Layer 2 w0.23: 103.5,-31.4 106.5,-28.4 109.6,-28.4 114.3,-33.1 v1(115.6,-33.1)
  Bottom Layer w0.15: v6@90,-31.4 J6.16@92.4,-31.4
  other v6: 89.8,-31.4
FMC_D11: J6.17 U5.44 | length 32.5
  Top Layer w0.23: U5.44@113.5,-34.2 115.4,-34.2 v1(115.6,-34.4)
  Layer 2 w0.15: v5(90.6,-31.9) 103.82,-31.9
  Layer 2 w0.23: 103.82,-31.9 106.82,-28.9 109.5,-28.9 114.1,-33.5 114.7,-33.5 v1(115.6,-34.4)
  Bottom Layer w0.23: v5(90.6,-31.9) J6.17@92.4,-31.9
FMC_D12: J6.18 U5.45 | length 34.6
  Top Layer w0.23: U5.45@113.5,-34.7 114.7,-34.7 115.689,-35.689 v1(115.725,-35.689)
  Layer 2 w0.15: v6@90,-32.4 104.25,-32.4
  Layer 2 w0.23: 104.25,-32.4 107.25,-29.4 109.436,-29.4 v1(115.725,-35.689)
  Bottom Layer w0.15: v6@90,-32.4 J6.18@92.4,-32.4
  other v6: 89.8,-32.4
FMC_D13: J6.19 U5.55 | length 32.2
  Top Layer w0.23: v1(116.8,-37.2) 116.8,-37.5 117.2,-37.9 U5.55@117.2,-38.9
  Layer 2 w0.15: v5(90.6,-32.9) 105.6,-32.9
  Layer 2 w0.23: 105.6,-32.9 110.6,-37.9 116,-37.9 116.7,-37.2 v1(116.8,-37.2)
  Bottom Layer w0.23: v5(90.6,-32.9) J6.19@92.4,-32.9
FMC_D14: J6.20 U5.56 | length 35.4
  Top Layer w0.23: v1(117.3,-41.3) 117.7,-40.9 U5.56@117.7,-38.9
  Layer 2 w0.15: v6@90.05,-33.4 103.4,-33.4
  Layer 2 w0.23: 103.4,-33.4 111.3,-41.3 v1(117.3,-41.3)
  Bottom Layer w0.15: v6@90.042,-33.392 90.05,-33.4 J6.20@92.4,-33.4
  other v6: 89.8,-33.35
FMC_D15: J6.21 U5.57 | length 37.4
  Top Layer w0.23: v1(118.2,-42.4) U5.57@118.2,-38.9
  Layer 2 w0.15: v5(90.6,-33.9) 102.8,-33.9
  Layer 2 w0.23: 102.8,-33.9 112.425,-43.525 117.075,-43.525 v1(118.2,-42.4)
  Bottom Layer w0.23: v5(90.6,-33.9) J6.21@92.4,-33.9
FMC_NE1: J6.1 U5.88 | length 47.8
  Top Layer w0.23: v1(122.503,-31.2) U5.88@128.9,-31.2
  Layer 1 w0.15: v5(90.575,-23.825) 92.975,-23.825
  Layer 1 w0.23: 92.975,-23.825 94.65,-22.15 118.785,-22.15 121.584,-24.949 121.584,-30.375 122.409,-31.2 v1(122.503,-31.2)
  Bottom Layer w0.23: v5(90.575,-23.825) 90.65,-23.9 J6.1@92.4,-23.9
FMC_NOE: J6.4 U5.85 | length 77.9
  Top Layer w0.23: U5.85@128.9,-32.7 130.036,-32.7 130.359,-33.023 131.041,-33.023 131.064,-33 131.4,-33 v1(131.6,-33.2)
  Layer 2 w0.23: v6@89.95,-25.4 v6(89.8,-25.4) 89.75,-25.4 89.1,-24.75 89.1,-18.05 98.55,-8.6 116,-8.6 123.1,-15.7 127.9,-15.7 131.6,-19.4 v1(131.6,-33.2)
  Bottom Layer w0.15: v6@89.95,-25.4 J6.4@92.4,-25.4
FMC_NWE: J6.3 U5.86 | length 71
  Top Layer w0.23: U5.86@128.9,-32.2 v1(130.7,-32.2)
  Layer 2 w0.23: v5(90.55,-24.9) 91.65,-23.8 91.65,-16.89 98.7,-9.84 115.84,-9.84 122.5,-16.5 128,-16.5 130.7,-19.2 v1(130.7,-32.2)
  Bottom Layer w0.23: v5(90.55,-24.9) J6.3@92.4,-24.9
FPGA_BUS_D0: U5.22 U10.31 | length 70.8
  Top Layer w0.23: U10.31@51.7,-30.8 75.6,-30.8 85.15,-21.25 115.95,-21.25 116.7,-22 U5.22@116.7,-23.5
FPGA_BUS_D1: U5.23 U10.30 | length 69.9
  Top Layer w0.23: U10.30@51.7,-31.3 75.85,-31.3 85.4,-21.75 115.65,-21.75 116.2,-22.3 U5.23@116.2,-23.5
FPGA_BUS_D2: U5.24 U10.28 | length 69.2
  Top Layer w0.23: U10.28@51.7,-32.3 75.6,-32.3 81.484,-26.416 85.6,-22.3 115.4,-22.3 115.7,-22.6 U5.24@115.7,-23.5
FPGA_BUS_D3: U5.25 U10.144 | length 78.7
  Top Layer w0.2: U10.144@49.75,-47.75 49.75,-48.6 52.15,-51 65.81,-51 81.218,-35.592 99.719,-35.592 111.811,-23.5 U5.25@115.2,-23.5
FPGA_BUS_D4: U5.28 U10.143 | length 76.8
  Top Layer w0.2: U10.143@49.25,-47.75 49.25,-48.65 52.1,-51.5 65.805,-51.5 81.363,-35.942 99.958,-35.942 109.7,-26.2 U5.28@113.5,-26.2
FPGA_BUS_D5: U5.29 U10.142 | length 77.5
  Top Layer w0.2: U10.142@48.75,-47.75 48.75,-48.7 52,-51.95 65.85,-51.95 81.508,-36.292 100.308,-36.292 100.345,-36.255 109.9,-26.7 U5.29@113.5,-26.7
FPGA_BUS_D6: U5.30 U10.141 | length 78.2
  Top Layer w0.2: U10.141@48.25,-47.75 48.25,-48.75 51.9,-52.4 65.9,-52.4 81.658,-36.642 100.608,-36.642 110.05,-27.2 U5.30@113.5,-27.2
FPGA_BUS_D7: U5.31 U10.137 | length 80.3
  Top Layer w0.2: U10.137@46.25,-47.75 46.25,-48.6 50.5,-52.85 65.955,-52.85 81.813,-36.992 100.935,-36.992 110.227,-27.7 U5.31@113.5,-27.7
FPGA_CLK: U5.17 U10.33 | length 73.7
  Top Layer w0.23: U10.33@51.7,-29.8 75.2,-29.8 84.8,-20.2 117.4,-20.2 119.2,-22 U5.17@119.2,-23.5
FPGA_SYNC: U5.18 U10.32 | length 72.7
  Top Layer w0.23: U10.32@51.7,-30.3 75.4,-30.3 85,-20.7 116.9,-20.7 118.7,-22.5 U5.18@118.7,-23.5

## Text inside footprints (layer, text, board x,y; h text height)
BOOT: Mechanical 1, Top Assy "BOARD EDGE" at 133.418,-26.999 h1.52
J1: Mechanical 1, Top Assy "BOARD" at 188.172,-48.323 h0.42 r90; Mechanical 1, Top Assy "EDGE" at 189.015,-48.156 h0.42 r90; Mechanical 1, Top Assy "BOARD" at 188.172,-54.823 h0.42 r90; Mechanical 1, Top Assy "EDGE" at 189.015,-54.656 h0.42 r90
J2: Mechanical 1, Top Assy "BOARD" at 188.172,-60.623 h0.42 r90; Mechanical 1, Top Assy "EDGE" at 189.015,-60.456 h0.42 r90; Mechanical 1, Top Assy "BOARD" at 188.172,-67.123 h0.42 r90; Mechanical 1, Top Assy "EDGE" at 189.015,-66.956 h0.42 r90
J3: Mechanical 1, Top Assy "BOARD" at 188.172,-35.973 h0.42 r90; Mechanical 1, Top Assy "EDGE" at 189.015,-35.806 h0.42 r90; Mechanical 1, Top Assy "BOARD" at 188.172,-42.473 h0.42 r90; Mechanical 1, Top Assy "EDGE" at 189.015,-42.306 h0.42 r90
J5: Mechanical 1, Top Assy "EDGE" at 189.015,-29.956 h0.42 r90; Mechanical 1, Top Assy "BOARD" at 188.172,-30.123 h0.42 r90; Mechanical 1, Top Assy "EDGE" at 189.015,-23.456 h0.42 r90; Mechanical 1, Top Assy "BOARD" at 188.172,-23.623 h0.42 r90
J8: Mechanical 1, Top Assy "EDGE" at 186.88,-12.707 h1.52 r90; Mechanical 1, Top Assy "BOARD" at 186.87,-15.637 h1.52 r90
MIС_IN2: Mechanical 1, Top Assy "BOARD EDGE" at 170.582,-48.601 h1.52 r180
PTT_IN: Mechanical 1, Top Assy "BOARD EDGE" at 104.582,-26.401 h1.52 r180
SPEAKER: Mechanical 1, Top Assy "BOARD EDGE" at 168.736,-21.888 h0.42 r270
U10: Mechanical 15 "*" at 53.573,-47.058 h1.27; Mechanical 15 "*" at 53.573,-47.058 h1.27